# EAGLE board SparkFun NEO-M8U-Panel (EAGLE 9.5.2), part 1 of 2
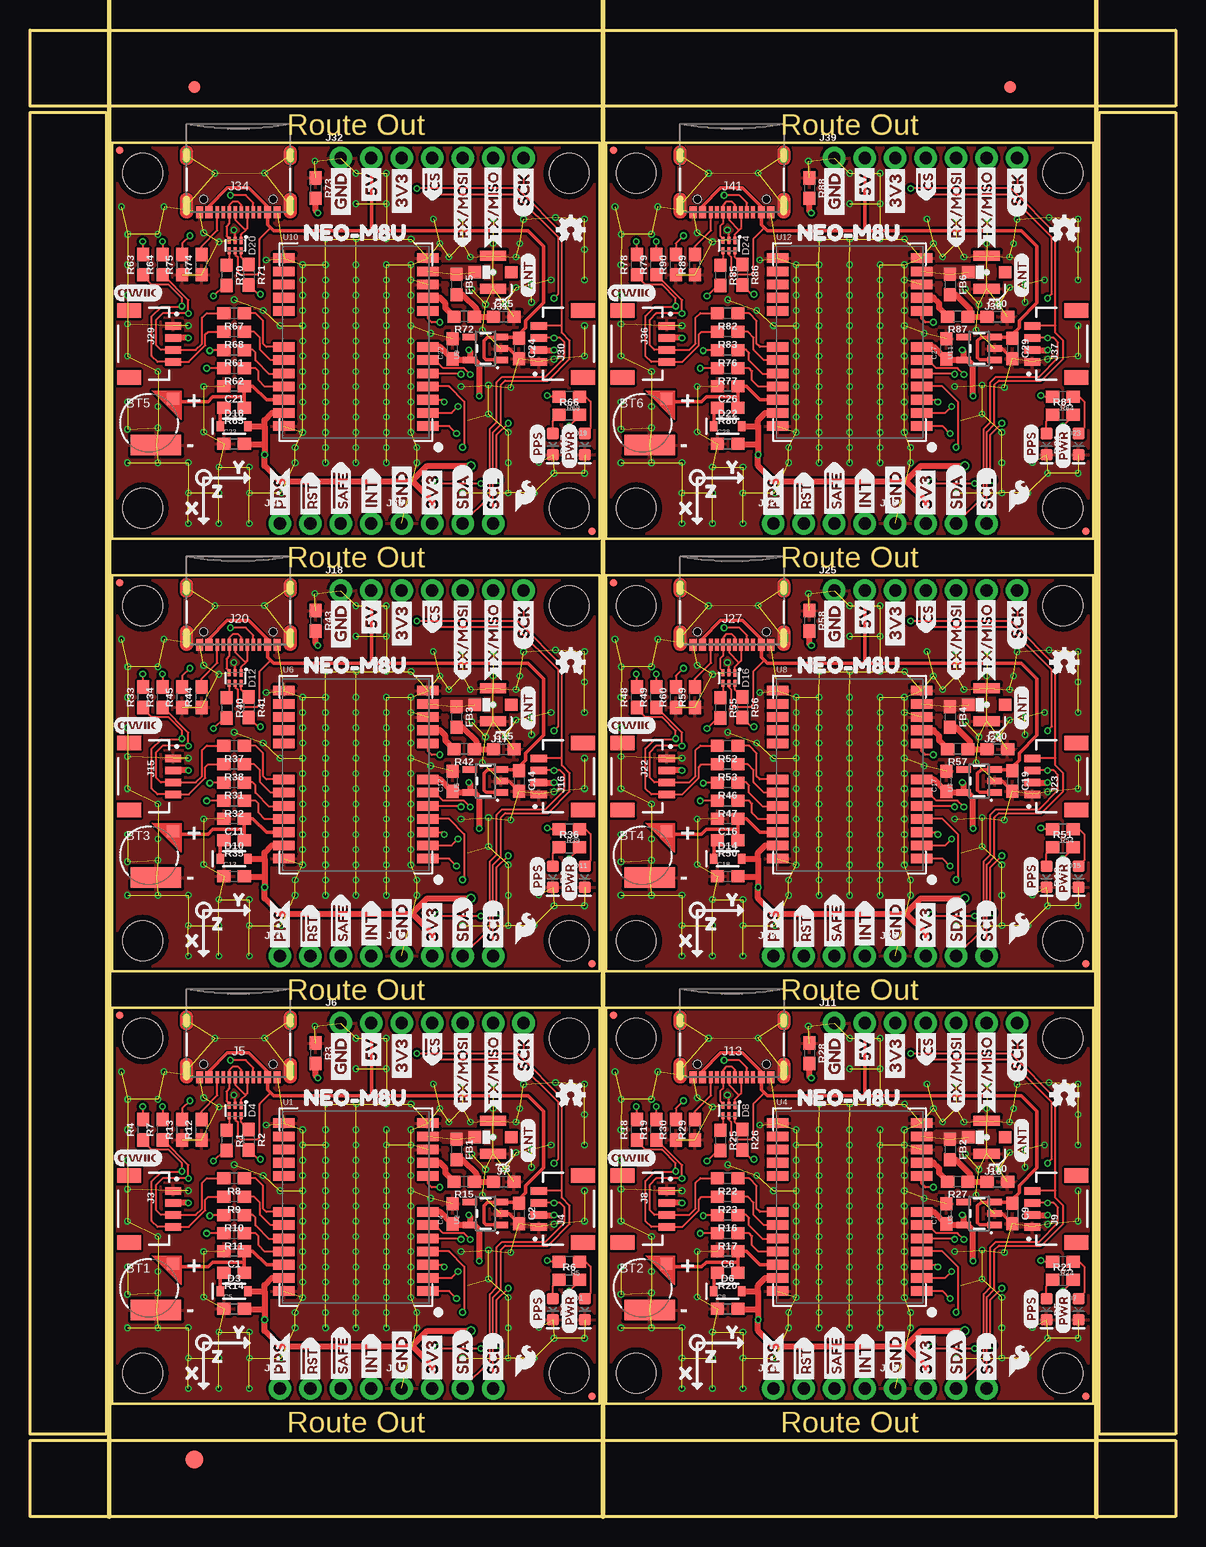
[diagram p0: board, top side]
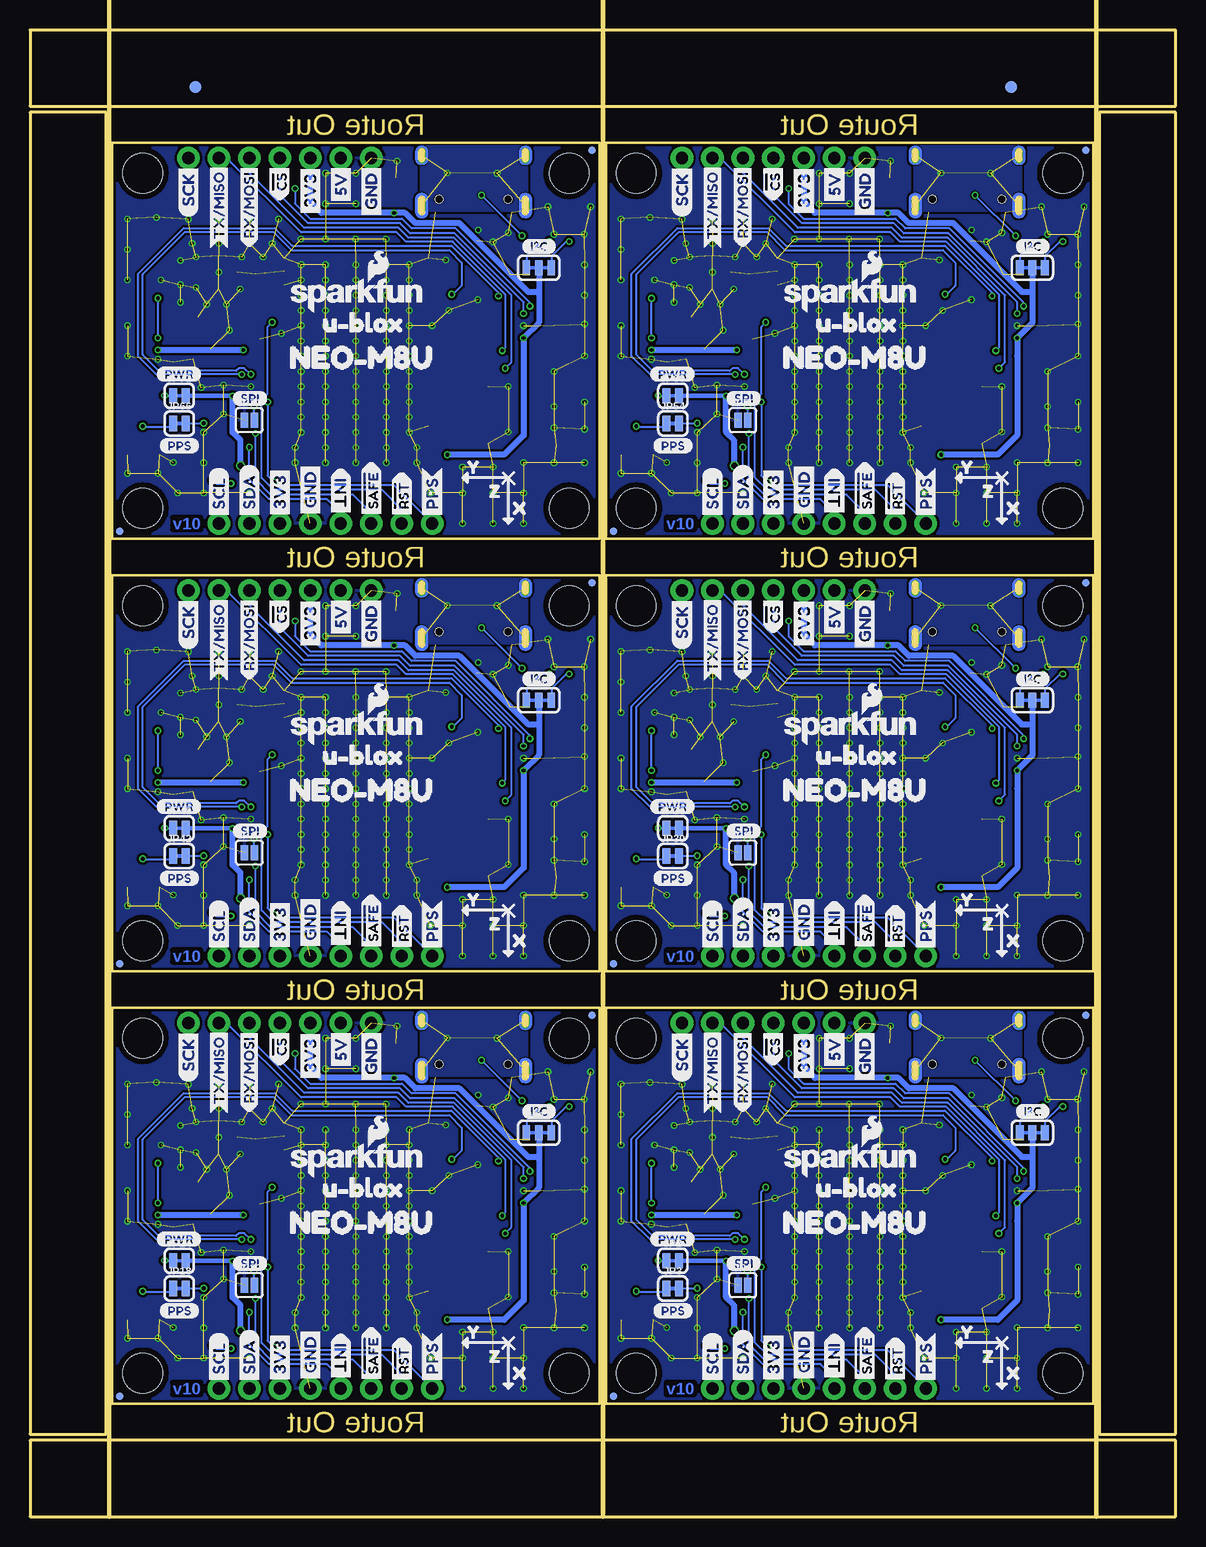
[diagram p1: board, bottom side, seen from below]

Size 95.5 x 123.88 mm. Coordinates in mm from the lower left corner, seen from the top.
Outline: 6.86,9.4 6.86,42.39 47.5,42.39 47.5,9.4 6.86,9.4
Outline: 48.01,9.4 48.01,42.39 88.65,42.39 88.65,9.4 48.01,9.4
Outline: 6.86,45.44 6.86,78.44 47.5,78.44 47.5,45.44 6.86,45.44
Outline: 48.01,45.44 48.01,78.44 88.65,78.44 88.65,45.44 48.01,45.44
Outline: 6.86,81.48 6.86,114.48 47.5,114.48 47.5,81.48 6.86,81.48
Outline: 48.01,81.48 48.01,114.48 88.65,114.48 88.65,81.48 48.01,81.48
Outline: 0,6.35 95.5,6.35 95.5,0 0,0 0,6.35
Outline: 89.15,117.02 95.5,117.02 95.5,6.86 89.15,6.86 89.15,117.02
Outline: 0,123.88 95.5,123.88 95.5,117.53 0,117.53 0,123.88
Outline: 0,117.02 6.35,117.02 6.35,6.86 0,6.86 0,117.02
Copper layers (1*16): Top 0.035mm / dielectric 1.5mm / Bottom 0.035mm
Design rules "SparkFun": minimum track width 4mil, minimum drill 6mil, track to track 4mil, track to pad 4mil, pad to pad 4mil, via to via 4mil, smd to smd 4mil, copper to edge 4mil, drill to drill 4mil, minimum pad ring 5mil, minimum via ring 5mil, stop-mask expansion 4mil, vias tented up to drill 25mil, thermal gap 10mil
Net classes: 2 3.3V: width 0.508 mm
bRestrict: area 36.1,18.2 to 37,18.5; area 77.2,18.2 to 78.1,18.5; area 36.1,54.2 to 37,54.6; area 77.2,54.2 to 78.1,54.6; area 36.1,90.2 to 37,90.6; area 77.2,90.2 to 78.1,90.6
Milling: 3 lines

## Footprints (pad centres in the part's own frame; a part is rotated, then mirrored left to right if it is on the bottom)
ML414H_IV01E = smd 1 x 1: + 2.022,2.032 | smd 4.2 x 1.7: - 0.6,-1.85
0603 = smd 1.1 x 1: 1 -0.85,0; 2 0.85,0
LED-0603 = smd 1 x 1: A -0.877,0; C 0.877,0
SOD-323 = smd 0.63 x 0.83: A 1.15,0; C -1.15,0
SOT886 = smd 0.61 x 0.25: 1 -0.405,0.5 | smd 0.56 x 0.25: 2 -0.43,0; 3 -0.43,-0.5; 4 0.43,-0.5; 5 0.43,0; 6 0.43,0.5
FIDUCIAL-1X2 = smd 1 x 1: 1 0,0
FIDUCIAL-1.5X3 = smd 1.5 x 1.5: 1 0,0
1X04_NO_SILK = drill 1.016 pad 1.88: 1 0,0; 2 2.54,0; 3 5.08,0; 4 7.62,0
JST04_1MM_RA = smd 0.6 x 1.35: 1 -1.5,0; 2 -0.5,0; 3 0.5,0; 4 1.5,0 | smd 1.2 x 2: NC1 2.8,-3.675; NC2 -2.8,-3.675
USB-C-16P-2LAYER-PADS = smd 0.3 x 1: A5 -1.25,-0.34; A6 -0.25,-0.34; A7 0.25,-0.34; A8 1.25,-0.34; B5 1.75,-0.34; B6 0.75,-0.34; B7 -0.75,-0.34; B8 -1.75,-0.34 | smd 0.6 x 1: GND -3.225,-0.34; GND2 3.225,-0.34; VBUS1 -2.45,-0.34; VBUS2 2.45,-0.34 | drill 0.4 pad 0.6 long: SHLD1 -4.318,-0.915; SHLD2 4.318,-0.915; SHLD3 -4.318,-5.095; SHLD4 4.318,-5.095 | hole 0.65: -2.89,-1.445; 2.89,-1.445
1X07_NO_SILK = drill 1.016 pad 1.88: 1 0,0; 2 2.54,0; 3 5.08,0; 4 7.62,0; 5 10.16,0; 6 12.7,0; 7 15.24,0
U.FL = smd 2.2 x 0.85: 1 0,1.375; 2 0,-1.375 | smd 1.05 x 1: FEED 1.525,0; NC -1.525,0
SMT-JUMPER_3_2-NC_TRACE_SILK = smd 0.66 x 1.27: 1 -1.041,0; 2 0,0; 3 1.041,0
SMT-JUMPER_2_NC_TRACE_SILK = smd 0.66 x 1.27: 1 -0.521,0; 2 0.521,0
SMT-JUMPER_2_NO_SILK = smd 0.635 x 1.27: 1 -0.406,0; 2 0.406,0
MICRO-FIDUCIAL = smd 0.635 x 0.635: 1 0,0
STAND-OFF = hole 3.302: 0,0
NEO-M9N/M8T/M8U = smd 1.8 x 0.8: 1 6,-7; 2 6,-5.9; 3 6,-4.8; 4 6,-3.7; 5 6,-2.6; 6 6,-1.5; 7 6,-0.4; 8 6,2.6; 9 6,3.7; 10 6,4.8; 11 6,5.9; 12 6,7; 13 -6,7; 14 -6,5.9; 15 -6,4.8; 16 -6,3.7; 17 -6,2.6; 18 -6,-0.4; 19 -6,-1.5; 20 -6,-2.6; 21 -6,-3.7; 22 -6,-4.8; 23 -6,-5.9; 24 -6,-7
SOT23-5 = smd 0.55 x 1.2: 1 -0.95,-1.3; 2 0,-1.3; 3 0.95,-1.3; 4 0.95,1.3; 5 -0.95,1.3

## Placement (x,y rotation side)
BT1  6.8MM_COIN_CELL  [ML414H_IV01E]  9.91,19.05 0 top
BT2  6.8MM_COIN_CELL  [ML414H_IV01E]  51.05,19.05 0 top
BT3  6.8MM_COIN_CELL  [ML414H_IV01E]  9.91,55.09 0 top
BT4  6.8MM_COIN_CELL  [ML414H_IV01E]  51.05,55.09 0 top
BT5  6.8MM_COIN_CELL  [ML414H_IV01E]  9.91,91.14 0 top
BT6  6.8MM_COIN_CELL  [ML414H_IV01E]  51.05,91.14 0 top
C1  1.0uF  [0603]  17.02,22.12 180 top
C2  1.0uF  [0603]  40.77,25.25 270 top
C3  47pF  [0603]  39.5,27.91 0 top
C4  1.0uF  [0603]  35.23,25.22 90 top
C5  0.1uF  [0603]  17.02,17.3 0 top
C6  1.0uF  [0603]  58.17,22.12 180 top
C7  1.0uF  [0603]  76.38,25.22 90 top
C8  0.1uF  [0603]  58.17,17.3 0 top
C9  1.0uF  [0603]  81.92,25.25 270 top
C10  47pF  [0603]  80.65,27.91 0 top
C11  1.0uF  [0603]  17.02,58.17 180 top
C12  1.0uF  [0603]  35.23,61.26 90 top
C13  0.1uF  [0603]  17.02,53.34 0 top
C14  1.0uF  [0603]  40.77,61.29 270 top
C15  47pF  [0603]  39.5,63.96 0 top
C16  1.0uF  [0603]  58.17,58.17 180 top
C17  1.0uF  [0603]  76.38,61.26 90 top
C18  0.1uF  [0603]  58.17,53.34 0 top
C19  1.0uF  [0603]  81.92,61.29 270 top
C20  47pF  [0603]  80.65,63.96 0 top
C21  1.0uF  [0603]  17.02,94.21 180 top
C22  1.0uF  [0603]  35.23,97.31 90 top
C23  0.1uF  [0603]  17.02,89.38 0 top
C24  1.0uF  [0603]  40.77,97.33 270 top
C25  47pF  [0603]  39.5,100 0 top
C26  1.0uF  [0603]  58.17,94.21 180 top
C27  1.0uF  [0603]  76.38,97.31 90 top
C28  0.1uF  [0603]  58.17,89.38 0 top
C29  1.0uF  [0603]  81.92,97.33 270 top
C30  47pF  [0603]  80.65,100 0 top
D1  RED  [LED-0603]  46.25,17.27 270 top
D2  BLUE  [LED-0603]  43.59,17.27 270 top
D3  0.5A/40V/420mV  [SOD-323]  17.02,18.77 0 top
D4  PRTR5V0U2F  [SOT886]  17.12,33.83 270 top
D5  BLUE  [LED-0603]  84.73,17.27 270 top
D6  0.5A/40V/420mV  [SOD-323]  58.17,18.77 0 top
D7  RED  [LED-0603]  87.4,17.27 270 top
D8  PRTR5V0U2F  [SOT886]  58.27,33.83 270 top
D9  BLUE  [LED-0603]  43.59,53.31 270 top
D10  0.5A/40V/420mV  [SOD-323]  17.02,54.81 0 top
D11  RED  [LED-0603]  46.25,53.31 270 top
D12  PRTR5V0U2F  [SOT886]  17.12,69.88 270 top
D13  BLUE  [LED-0603]  84.73,53.31 270 top
D14  0.5A/40V/420mV  [SOD-323]  58.17,54.81 0 top
D15  RED  [LED-0603]  87.4,53.31 270 top
D16  PRTR5V0U2F  [SOT886]  58.27,69.88 270 top
D17  BLUE  [LED-0603]  43.59,89.36 270 top
D18  0.5A/40V/420mV  [SOD-323]  17.02,90.86 0 top
D19  RED  [LED-0603]  46.25,89.36 270 top
D20  PRTR5V0U2F  [SOT886]  17.12,105.92 270 top
D21  BLUE  [LED-0603]  84.73,89.36 270 top
D22  0.5A/40V/420mV  [SOD-323]  58.17,90.86 0 top
D23  RED  [LED-0603]  87.4,89.36 270 top
D24  PRTR5V0U2F  [SOT886]  58.27,105.92 270 top
E$1  [FIDUCIAL-1X2]  13.72,119.11 0 top
E$2  [FIDUCIAL-1X2]  13.72,119.11 0 bottom
E$3  [FIDUCIAL-1X2]  81.72,119.11 0 top
E$4  [FIDUCIAL-1X2]  81.72,119.11 0 bottom
E$5  [FIDUCIAL-1.5X3]  13.72,4.76 0 top
FB1  30Ω/1.8A  [0603]  35.56,30.58 270 top
FB2  30Ω/1.8A  [0603]  76.71,30.58 270 top
FB3  30Ω/1.8A  [0603]  35.56,66.62 270 top
FB4  30Ω/1.8A  [0603]  76.71,66.62 270 top
FB5  30Ω/1.8A  [0603]  35.56,102.67 270 top
FB6  30Ω/1.8A  [0603]  76.71,102.67 270 top
J1  [1X04_NO_SILK]  30.99,10.67 0 top
J2  [1X04_NO_SILK]  20.83,10.67 0 top
J3  Qwiic Right Angle  [JST04_1MM_RA]  11.94,25.63 270 top
J4  Qwiic Right Angle  [JST04_1MM_RA]  42.42,25.63 90 top
J5  [USB-C-16P-2LAYER-PADS]  17.37,36.25 180 top
J6  [1X07_NO_SILK]  25.91,41.12 0 top
J7  U.FL  [U.FL]  38.61,31.6 180 top
J8  Qwiic Right Angle  [JST04_1MM_RA]  53.09,25.63 270 top
J9  Qwiic Right Angle  [JST04_1MM_RA]  83.57,25.63 90 top
J10  U.FL  [U.FL]  79.76,31.6 180 top
J11  [1X07_NO_SILK]  67.06,41.12 0 top
J12  [1X04_NO_SILK]  72.14,10.67 0 top
J13  [USB-C-16P-2LAYER-PADS]  58.52,36.25 180 top
J14  [1X04_NO_SILK]  61.98,10.67 0 top
J15  Qwiic Right Angle  [JST04_1MM_RA]  11.94,61.67 270 top
J16  Qwiic Right Angle  [JST04_1MM_RA]  42.42,61.67 90 top
J17  U.FL  [U.FL]  38.61,67.64 180 top
J18  [1X07_NO_SILK]  25.91,77.17 0 top
J19  [1X04_NO_SILK]  30.99,46.71 0 top
J20  [USB-C-16P-2LAYER-PADS]  17.37,72.29 180 top
J21  [1X04_NO_SILK]  20.83,46.71 0 top
J22  Qwiic Right Angle  [JST04_1MM_RA]  53.09,61.67 270 top
J23  Qwiic Right Angle  [JST04_1MM_RA]  83.57,61.67 90 top
J24  U.FL  [U.FL]  79.76,67.64 180 top
J25  [1X07_NO_SILK]  67.06,77.17 0 top
J26  [1X04_NO_SILK]  72.14,46.71 0 top
J27  [USB-C-16P-2LAYER-PADS]  58.52,72.29 180 top
J28  [1X04_NO_SILK]  61.98,46.71 0 top
J29  Qwiic Right Angle  [JST04_1MM_RA]  11.94,97.71 270 top
J30  Qwiic Right Angle  [JST04_1MM_RA]  42.42,97.71 90 top
J31  U.FL  [U.FL]  38.61,103.68 180 top
J32  [1X07_NO_SILK]  25.91,113.21 0 top
J33  [1X04_NO_SILK]  30.99,82.75 0 top
J34  [USB-C-16P-2LAYER-PADS]  17.37,108.33 180 top
J35  [1X04_NO_SILK]  20.83,82.75 0 top
J36  Qwiic Right Angle  [JST04_1MM_RA]  53.09,97.71 270 top
J37  Qwiic Right Angle  [JST04_1MM_RA]  83.57,97.71 90 top
J38  U.FL  [U.FL]  79.76,103.68 180 top
J39  [1X07_NO_SILK]  67.06,113.21 0 top
J40  [1X04_NO_SILK]  72.14,82.75 0 top
J41  [USB-C-16P-2LAYER-PADS]  58.52,108.33 180 top
J42  [1X04_NO_SILK]  61.98,82.75 0 top
JP1  JUMPER-SMT_3_2-NC_TRACE_SILK  [SMT-JUMPER_3_2-NC_TRACE_SILK]  11.94,31.98 0 bottom
JP2  JUMPER-SMT_2_NC_TRACE_SILK  [SMT-JUMPER_2_NC_TRACE_SILK]  41.91,21.31 0 bottom
JP3  JUMPER-SMT_2_NC_TRACE_SILK  [SMT-JUMPER_2_NC_TRACE_SILK]  41.91,19 0 bottom
JP4  JUMPER-SMT_2_NO_SILK  [SMT-JUMPER_2_NO_SILK]  36.07,19.28 0 bottom
JP5  FIDUCIALUFIDUCIAL  [MICRO-FIDUCIAL]  46.86,10.03 0 top
JP6  FIDUCIALUFIDUCIAL  [MICRO-FIDUCIAL]  46.86,10.03 0 bottom
JP7  FIDUCIALUFIDUCIAL  [MICRO-FIDUCIAL]  7.49,41.76 0 top
JP8  FIDUCIALUFIDUCIAL  [MICRO-FIDUCIAL]  7.49,41.76 0 bottom
JP9  STAND-OFF  [STAND-OFF]  9.4,11.94 0 top
JP10  STAND-OFF  [STAND-OFF]  44.96,11.94 0 top
JP11  STAND-OFF  [STAND-OFF]  9.4,39.85 0 top
JP12  STAND-OFF  [STAND-OFF]  44.96,39.85 0 top
JP13  STAND-OFF  [STAND-OFF]  50.55,39.85 0 top
JP14  STAND-OFF  [STAND-OFF]  86.11,39.85 0 top
JP15  FIDUCIALUFIDUCIAL  [MICRO-FIDUCIAL]  88.01,10.03 0 top
JP16  FIDUCIALUFIDUCIAL  [MICRO-FIDUCIAL]  48.64,41.76 0 top
JP17  JUMPER-SMT_3_2-NC_TRACE_SILK  [SMT-JUMPER_3_2-NC_TRACE_SILK]  53.09,31.98 0 bottom
JP18  JUMPER-SMT_2_NC_TRACE_SILK  [SMT-JUMPER_2_NC_TRACE_SILK]  83.06,19 0 bottom
JP19  FIDUCIALUFIDUCIAL  [MICRO-FIDUCIAL]  88.01,10.03 0 bottom
JP20  FIDUCIALUFIDUCIAL  [MICRO-FIDUCIAL]  48.64,41.76 0 bottom
JP21  STAND-OFF  [STAND-OFF]  50.55,11.94 0 top
JP22  STAND-OFF  [STAND-OFF]  86.11,11.94 0 top
JP23  JUMPER-SMT_2_NO_SILK  [SMT-JUMPER_2_NO_SILK]  77.22,19.28 0 bottom
JP24  JUMPER-SMT_2_NC_TRACE_SILK  [SMT-JUMPER_2_NC_TRACE_SILK]  83.06,21.31 0 bottom
JP25  STAND-OFF  [STAND-OFF]  9.4,75.9 0 top
JP26  STAND-OFF  [STAND-OFF]  44.96,75.9 0 top
JP27  FIDUCIALUFIDUCIAL  [MICRO-FIDUCIAL]  46.86,46.08 0 top
JP28  FIDUCIALUFIDUCIAL  [MICRO-FIDUCIAL]  7.49,77.8 0 top
JP29  JUMPER-SMT_3_2-NC_TRACE_SILK  [SMT-JUMPER_3_2-NC_TRACE_SILK]  11.94,68.02 0 bottom
JP30  JUMPER-SMT_2_NC_TRACE_SILK  [SMT-JUMPER_2_NC_TRACE_SILK]  41.91,55.04 0 bottom
JP31  FIDUCIALUFIDUCIAL  [MICRO-FIDUCIAL]  46.86,46.08 0 bottom
JP32  FIDUCIALUFIDUCIAL  [MICRO-FIDUCIAL]  7.49,77.8 0 bottom
JP33  STAND-OFF  [STAND-OFF]  9.4,47.98 0 top
JP34  STAND-OFF  [STAND-OFF]  44.96,47.98 0 top
JP35  JUMPER-SMT_2_NO_SILK  [SMT-JUMPER_2_NO_SILK]  36.07,55.32 0 bottom
JP36  JUMPER-SMT_2_NC_TRACE_SILK  [SMT-JUMPER_2_NC_TRACE_SILK]  41.91,57.35 0 bottom
JP37  STAND-OFF  [STAND-OFF]  50.55,75.9 0 top
JP38  STAND-OFF  [STAND-OFF]  86.11,75.9 0 top
JP39  FIDUCIALUFIDUCIAL  [MICRO-FIDUCIAL]  88.01,46.08 0 top
JP40  FIDUCIALUFIDUCIAL  [MICRO-FIDUCIAL]  48.64,77.8 0 top
JP41  JUMPER-SMT_3_2-NC_TRACE_SILK  [SMT-JUMPER_3_2-NC_TRACE_SILK]  53.09,68.02 0 bottom
JP42  JUMPER-SMT_2_NC_TRACE_SILK  [SMT-JUMPER_2_NC_TRACE_SILK]  83.06,55.04 0 bottom
JP43  FIDUCIALUFIDUCIAL  [MICRO-FIDUCIAL]  88.01,46.08 0 bottom
JP44  FIDUCIALUFIDUCIAL  [MICRO-FIDUCIAL]  48.64,77.8 0 bottom
JP45  STAND-OFF  [STAND-OFF]  50.55,47.98 0 top
JP46  STAND-OFF  [STAND-OFF]  86.11,47.98 0 top
JP47  JUMPER-SMT_2_NO_SILK  [SMT-JUMPER_2_NO_SILK]  77.22,55.32 0 bottom
JP48  JUMPER-SMT_2_NC_TRACE_SILK  [SMT-JUMPER_2_NC_TRACE_SILK]  83.06,57.35 0 bottom
JP49  STAND-OFF  [STAND-OFF]  9.4,111.94 0 top
JP50  STAND-OFF  [STAND-OFF]  44.96,111.94 0 top
JP51  FIDUCIALUFIDUCIAL  [MICRO-FIDUCIAL]  46.86,82.12 0 top
JP52  FIDUCIALUFIDUCIAL  [MICRO-FIDUCIAL]  7.49,113.84 0 top
JP53  JUMPER-SMT_3_2-NC_TRACE_SILK  [SMT-JUMPER_3_2-NC_TRACE_SILK]  11.94,104.06 0 bottom
JP54  JUMPER-SMT_2_NC_TRACE_SILK  [SMT-JUMPER_2_NC_TRACE_SILK]  41.91,91.08 0 bottom
JP55  FIDUCIALUFIDUCIAL  [MICRO-FIDUCIAL]  46.86,82.12 0 bottom
JP56  FIDUCIALUFIDUCIAL  [MICRO-FIDUCIAL]  7.49,113.84 0 bottom
JP57  STAND-OFF  [STAND-OFF]  9.4,84.02 0 top
JP58  STAND-OFF  [STAND-OFF]  44.96,84.02 0 top
JP59  JUMPER-SMT_2_NO_SILK  [SMT-JUMPER_2_NO_SILK]  36.07,91.36 0 bottom
JP60  JUMPER-SMT_2_NC_TRACE_SILK  [SMT-JUMPER_2_NC_TRACE_SILK]  41.91,93.4 0 bottom
JP61  STAND-OFF  [STAND-OFF]  50.55,111.94 0 top
JP62  STAND-OFF  [STAND-OFF]  86.11,111.94 0 top
JP63  FIDUCIALUFIDUCIAL  [MICRO-FIDUCIAL]  88.01,82.12 0 top
JP64  FIDUCIALUFIDUCIAL  [MICRO-FIDUCIAL]  48.64,113.84 0 top
JP65  JUMPER-SMT_3_2-NC_TRACE_SILK  [SMT-JUMPER_3_2-NC_TRACE_SILK]  53.09,104.06 0 bottom
JP66  JUMPER-SMT_2_NC_TRACE_SILK  [SMT-JUMPER_2_NC_TRACE_SILK]  83.06,91.08 0 bottom
JP67  FIDUCIALUFIDUCIAL  [MICRO-FIDUCIAL]  88.01,82.12 0 bottom
JP68  FIDUCIALUFIDUCIAL  [MICRO-FIDUCIAL]  48.64,113.84 0 bottom
JP69  STAND-OFF  [STAND-OFF]  50.55,84.02 0 top
JP70  STAND-OFF  [STAND-OFF]  86.11,84.02 0 top
JP71  JUMPER-SMT_2_NO_SILK  [SMT-JUMPER_2_NO_SILK]  77.22,91.36 0 bottom
JP72  JUMPER-SMT_2_NC_TRACE_SILK  [SMT-JUMPER_2_NC_TRACE_SILK]  83.06,93.4 0 bottom
LOGO1  OSHW-LOGOMINI  [OSHW-LOGO-MINI]  45.08,35.15 0 top
LOGO2  SFE_LOGO_NAME_FLAME.1_INCH  [SFE_LOGO_NAME_FLAME_.1]  27.05,29.69 0 bottom
LOGO3  OSHW-LOGOMINI  [OSHW-LOGO-MINI]  86.23,35.15 0 top
LOGO4  SFE_LOGO_NAME_FLAME.1_INCH  [SFE_LOGO_NAME_FLAME_.1]  68.2,29.69 0 bottom
LOGO5  OSHW-LOGOMINI  [OSHW-LOGO-MINI]  45.08,71.2 0 top
LOGO6  SFE_LOGO_NAME_FLAME.1_INCH  [SFE_LOGO_NAME_FLAME_.1]  27.05,65.74 0 bottom
LOGO7  OSHW-LOGOMINI  [OSHW-LOGO-MINI]  86.23,71.2 0 top
LOGO8  SFE_LOGO_NAME_FLAME.1_INCH  [SFE_LOGO_NAME_FLAME_.1]  68.2,65.74 0 bottom
LOGO9  OSHW-LOGOMINI  [OSHW-LOGO-MINI]  45.08,107.24 0 top
LOGO10  SFE_LOGO_NAME_FLAME.1_INCH  [SFE_LOGO_NAME_FLAME_.1]  27.05,101.78 0 bottom
LOGO11  OSHW-LOGOMINI  [OSHW-LOGO-MINI]  86.23,107.24 0 top
LOGO12  SFE_LOGO_NAME_FLAME.1_INCH  [SFE_LOGO_NAME_FLAME_.1]  68.2,101.78 0 bottom
R1  27  [0603]  16.41,31.34 270 top
R2  27  [0603]  18.24,31.39 270 top
R3  100k  [0603]  23.83,38.61 270 top
R4  2.2k  [0603]  9.45,32.23 90 top
R5  1k  [0603]  44.96,21.23 180 top
R6  1k  [0603]  44.96,19.71 0 top
R7  2.2k  [0603]  11.07,32.23 90 top
R8  33  [0603]  17.02,28.17 180 top
R9  33  [0603]  17.02,26.64 180 top
R10  33  [0603]  17.02,25.12 180 top
R11  33  [0603]  17.02,23.6 180 top
R12  5.1k  [0603]  14.3,32.23 90 top
R13  5.1k  [0603]  12.7,32.23 90 top
R14  1k  [0603]  17.02,20.29 180 top
R15  10  [0603]  36.2,27.91 180 top
R16  33  [0603]  58.17,25.12 180 top
R17  33  [0603]  58.17,23.6 180 top
R18  2.2k  [0603]  50.6,32.23 90 top
R19  2.2k  [0603]  52.22,32.23 90 top
R20  1k  [0603]  58.17,20.29 180 top
R21  1k  [0603]  86.11,19.71 0 top
R22  33  [0603]  58.17,28.17 180 top
R23  33  [0603]  58.17,26.64 180 top
R24  1k  [0603]  86.11,21.23 180 top
R25  27  [0603]  57.56,31.34 270 top
R26  27  [0603]  59.39,31.39 270 top
R27  10  [0603]  77.34,27.91 180 top
R28  100k  [0603]  64.97,38.61 270 top
R29  5.1k  [0603]  55.45,32.23 90 top
R30  5.1k  [0603]  53.85,32.23 90 top
R31  33  [0603]  17.02,61.16 180 top
R32  33  [0603]  17.02,59.64 180 top
R33  2.2k  [0603]  9.45,68.28 90 top
R34  2.2k  [0603]  11.07,68.28 90 top
R35  1k  [0603]  17.02,56.34 180 top
R36  1k  [0603]  44.96,55.75 0 top
R37  33  [0603]  17.02,64.21 180 top
R38  33  [0603]  17.02,62.69 180 top
R39  1k  [0603]  44.96,57.28 180 top
R40  27  [0603]  16.41,67.39 270 top
R41  27  [0603]  18.24,67.44 270 top
R42  10  [0603]  36.2,63.96 180 top
R43  100k  [0603]  23.83,74.65 270 top
R44  5.1k  [0603]  14.3,68.28 90 top
R45  5.1k  [0603]  12.7,68.28 90 top
R46  33  [0603]  58.17,61.16 180 top
R47  33  [0603]  58.17,59.64 180 top
R48  2.2k  [0603]  50.6,68.28 90 top
R49  2.2k  [0603]  52.22,68.28 90 top
R50  1k  [0603]  58.17,56.34 180 top
R51  1k  [0603]  86.11,55.75 0 top
R52  33  [0603]  58.17,64.21 180 top
R53  33  [0603]  58.17,62.69 180 top
R54  1k  [0603]  86.11,57.28 180 top
R55  27  [0603]  57.56,67.39 270 top
R56  27  [0603]  59.39,67.44 270 top
R57  10  [0603]  77.34,63.96 180 top
R58  100k  [0603]  64.97,74.65 270 top
R59  5.1k  [0603]  55.45,68.28 90 top
R60  5.1k  [0603]  53.85,68.28 90 top
R61  33  [0603]  17.02,97.21 180 top
R62  33  [0603]  17.02,95.68 180 top
R63  2.2k  [0603]  9.45,104.32 90 top
R64  2.2k  [0603]  11.07,104.32 90 top
R65  1k  [0603]  17.02,92.38 180 top
R66  1k  [0603]  44.96,91.8 0 top
R67  33  [0603]  17.02,100.25 180 top
R68  33  [0603]  17.02,98.73 180 top
R69  1k  [0603]  44.96,93.32 180 top
R70  27  [0603]  16.41,103.43 270 top
R71  27  [0603]  18.24,103.48 270 top
R72  10  [0603]  36.2,100 180 top
R73  100k  [0603]  23.83,110.69 270 top
R74  5.1k  [0603]  14.3,104.32 90 top
R75  5.1k  [0603]  12.7,104.32 90 top
R76  33  [0603]  58.17,97.21 180 top
R77  33  [0603]  58.17,95.68 180 top
R78  2.2k  [0603]  50.6,104.32 90 top
R79  2.2k  [0603]  52.22,104.32 90 top
R80  1k  [0603]  58.17,92.38 180 top
R81  1k  [0603]  86.11,91.8 0 top
R82  33  [0603]  58.17,100.25 180 top
R83  33  [0603]  58.17,98.73 180 top
R84  1k  [0603]  86.11,93.32 180 top
R85  27  [0603]  57.56,103.43 270 top
R86  27  [0603]  59.39,103.48 270 top
R87  10  [0603]  77.34,100 180 top
R88  100k  [0603]  64.97,110.69 270 top
R89  5.1k  [0603]  55.45,104.32 90 top
R90  5.1k  [0603]  53.85,104.32 90 top
U1  U-BLOX_MEO-M8U  [NEO-M9N/M8T/M8U]  27.18,25.78 0 top
U2  3.3V  [SOT23-5]  37.97,25.25 90 top
U3  3.3V  [SOT23-5]  79.12,25.25 90 top
U4  U-BLOX_MEO-M8U  [NEO-M9N/M8T/M8U]  68.33,25.78 0 top
U5  3.3V  [SOT23-5]  37.97,61.29 90 top
U6  U-BLOX_MEO-M8U  [NEO-M9N/M8T/M8U]  27.18,61.82 0 top
U7  3.3V  [SOT23-5]  79.12,61.29 90 top
U8  U-BLOX_MEO-M8U  [NEO-M9N/M8T/M8U]  68.33,61.82 0 top
U9  3.3V  [SOT23-5]  37.97,97.33 90 top
U10  U-BLOX_MEO-M8U  [NEO-M9N/M8T/M8U]  27.18,97.87 0 top
U11  3.3V  [SOT23-5]  79.12,97.33 90 top
U12  U-BLOX_MEO-M8U  [NEO-M9N/M8T/M8U]  68.33,97.87 0 top
U$1  [SDA-[)]  36.07,10.92 90 top
U$2  [INT1]  28.45,11.05 90 top
U$3  [SCL-[)]  38.61,10.92 90 top
U$4  [SDA-[)]  36.07,10.92 90 bottom
U$5  [SCL-[)]  38.61,10.92 90 bottom
U$6  [3V3-04]  33.53,10.92 90 top
U$7  [3V3-04]  33.53,10.92 90 bottom
U$8  [GND-04]  30.99,11.05 90 top
U$9  [GND-04]  30.99,11.05 90 bottom
U$10  [I_SUPER2_C-()-03]  13.34,33.76 0 bottom
U$11  [SPI1]  37.46,21.08 0 bottom
U$12  [PPS0]  43.56,17.14 0 bottom
U$13  [X1]  12.06,11.94 0 top
U$14  [QWIIC_4MM]  9.02,29.87 0 top
U$15  [NEO#M8U0]  34.29,24.51 0 bottom
U$16  [X1]  14.99,11.94 0 bottom
U$17  [PWR1]  43.81,23.11 0 bottom
U$18  [PWR-()-03]  44.98,15.24 90 top
U$19  [5V]  28.45,37.06 90 top
U$20  [5V]  28.45,37.06 90 bottom
U$21  [Y2]  18.8,15.37 0 bottom
U$22  [U#BLOX3]  31.37,27.41 0 bottom
U$23  [CS#-<]]  33.55,37.31 90 top
U$24  [CS#-<]]  33.55,37.31 90 bottom
U$25  [ANT0]  41.53,29.46 90 top
U$26  [RX#MOSI3]  36.07,33.63 90 top
U$27  [Y2]  16,15.37 0 top
U$28  [Z0]  14.22,13.33 0 top
U$29  [TX#MISO1]  38.61,33.53 90 top
U$30  [Z0]  17.02,13.33 0 bottom
U$31  [RX#MOSI3]  36.09,33.63 90 bottom
U$32  [INT0]  28.45,15.37 270 bottom
U$33  [SFE_LOGO_FLAME_.1]  41.3,12.98 0 top
U$34  [NEO#M8U0]  21.72,34.92 0 top
U$35  [#RST3]  23.37,10.79 90 top
U$36  [#RST3]  23.37,10.79 90 bottom
U$37  [TX#MISO1]  38.61,33.53 90 bottom
U$38  [SCK-(]-04]  41.15,36.2 90 top
U$39  [#SAFE1]  25.91,10.79 90 top
U$40  [#SAFE1]  25.91,10.79 90 bottom
U$41  [SCK-(]-04]  41.15,36.2 90 bottom
U$42  [SDA-[)]  77.22,10.92 90 top
U$43  [PPS5]  20.83,10.92 90 top
U$44  [PPS5]  20.83,10.92 90 bottom
U$45  [SCL-[)]  79.76,10.92 90 top
U$46  [SDA-[)]  77.22,10.92 90 bottom
U$47  [SCL-[)]  79.76,10.92 90 bottom
U$48  [3V3-04]  74.68,10.92 90 top
U$49  [3V3-04]  74.68,10.92 90 bottom
U$50  [GND-04]  72.14,11.05 90 top
U$51  [GND-04]  72.14,11.05 90 bottom
U$52  [PPS0]  42.32,15.62 90 top
U$53  [I_SUPER2_C-()-03]  54.48,33.76 0 bottom
U$54  [U#BLOX3]  72.52,27.41 0 bottom
U$55  [#RST3]  64.52,10.79 90 top
U$56  [#RST3]  64.52,10.79 90 bottom
U$57  [#SAFE1]  67.06,10.79 90 top
U$58  [#SAFE1]  67.06,10.79 90 bottom
U$59  [PPS5]  61.98,10.92 90 top
U$60  [3V3-04]  30.99,36.04 90 bottom
U$61  [3V3-04]  30.99,36.04 90 top
U$62  [GND-04]  25.91,35.92 90 bottom
U$63  [GND-04]  25.91,35.92 90 top
U$64  [PPS5]  61.98,10.92 90 bottom
U$65  [PPS0]  83.46,15.62 90 top
U$66  [3V3-04]  72.14,36.04 90 bottom
U$67  [3V3-04]  72.14,36.04 90 top
U$68  [GND-04]  67.06,35.92 90 bottom
U$69  [GND-04]  67.06,35.92 90 top
U$70  [PWR-()-03]  86.13,15.24 90 top
U$71  [5V]  69.6,37.06 90 top
U$72  [5V]  69.6,37.06 90 bottom
U$73  [CS#-<]]  74.7,37.31 90 top
U$74  [CS#-<]]  74.7,37.31 90 bottom
U$75  [SCK-(]-04]  82.3,36.2 90 top
U$76  [SCK-(]-04]  82.3,36.2 90 bottom
U$77  [SFE_LOGO_FLAME_.1]  82.45,12.98 0 top
U$78  [RX#MOSI3]  77.24,33.63 90 bottom
U$79  [TX#MISO1]  79.76,33.53 90 bottom
U$80  [SPI1]  78.61,21.08 0 bottom
U$81  [QWIIC_4MM]  50.16,29.87 0 top
U$82  [PPS0]  84.71,17.14 0 bottom
U$83  [PWR1]  84.96,23.11 0 bottom
U$84  [ANT0]  82.68,29.46 90 top
U$85  [X1]  53.21,11.94 0 top
U$86  [Y2]  57.15,15.37 0 top
U$87  [Z0]  55.37,13.33 0 top
U$88  [RX#MOSI3]  77.22,33.63 90 top
U$89  [TX#MISO1]  79.76,33.53 90 top
U$90  [NEO#M8U0]  75.44,24.51 0 bottom
U$91  [X1]  56.13,11.94 0 bottom
U$92  [Y2]  59.94,15.37 0 bottom
U$93  [Z0]  58.17,13.33 0 bottom
U$94  [INT1]  69.6,11.05 90 top
U$95  [INT0]  69.6,15.37 270 bottom
U$96  [NEO#M8U0]  62.86,34.92 0 top
U$97  [SDA-[)]  36.07,46.96 90 top
U$98  [SCL-[)]  38.61,46.96 90 top
U$99  [SDA-[)]  36.07,46.96 90 bottom
U$100  [SCL-[)]  38.61,46.96 90 bottom
U$101  [3V3-04]  33.53,46.96 90 top
U$102  [3V3-04]  33.53,46.96 90 bottom
U$103  [GND-04]  30.99,47.09 90 top
U$104  [GND-04]  30.99,47.09 90 bottom
U$105  [I_SUPER2_C-()-03]  13.34,69.8 0 bottom
U$106  [U#BLOX3]  31.37,63.45 0 bottom
U$107  [#RST3]  23.37,46.84 90 top
U$108  [#RST3]  23.37,46.84 90 bottom
U$109  [#SAFE1]  25.91,46.84 90 top
U$110  [#SAFE1]  25.91,46.84 90 bottom
U$111  [PPS5]  20.83,46.96 90 top
U$112  [PPS5]  20.83,46.96 90 bottom
U$113  [PPS0]  42.32,51.66 90 top
U$114  [3V3-04]  30.99,72.09 90 bottom
U$115  [3V3-04]  30.99,72.09 90 top
U$116  [GND-04]  25.91,71.96 90 bottom
U$117  [GND-04]  25.91,71.96 90 top
U$118  [PWR-()-03]  44.98,51.28 90 top
U$119  [5V]  28.45,73.1 90 top
U$120  [5V]  28.45,73.1 90 bottom
U$121  [CS#-<]]  33.55,73.36 90 top
U$122  [CS#-<]]  33.55,73.36 90 bottom
U$123  [SCK-(]-04]  41.15,72.24 90 top
U$124  [SCK-(]-04]  41.15,72.24 90 bottom
U$125  [SFE_LOGO_FLAME_.1]  41.3,49.02 0 top
U$126  [RX#MOSI3]  36.09,69.67 90 bottom
U$127  [TX#MISO1]  38.61,69.57 90 bottom
U$128  [SPI1]  37.46,57.12 0 bottom
U$129  [QWIIC_4MM]  9.02,65.91 0 top
U$130  [PPS0]  43.56,53.19 0 bottom
U$131  [PWR1]  43.81,59.16 0 bottom
U$132  [ANT0]  41.53,65.51 90 top
U$133  [X1]  12.06,47.98 0 top
U$134  [Y2]  16,51.41 0 top
U$135  [Z0]  14.22,49.38 0 top
U$136  [RX#MOSI3]  36.07,69.67 90 top
U$137  [TX#MISO1]  38.61,69.57 90 top
U$138  [NEO#M8U0]  34.29,60.55 0 bottom
U$139  [X1]  14.99,47.98 0 bottom
U$140  [Y2]  18.8,51.41 0 bottom
U$141  [Z0]  17.02,49.38 0 bottom
U$142  [INT1]  28.45,47.09 90 top
U$143  [INT0]  28.45,51.41 270 bottom
U$144  [NEO#M8U0]  21.72,70.97 0 top
U$145  [SDA-[)]  77.22,46.96 90 top
U$146  [SCL-[)]  79.76,46.96 90 top
U$147  [SDA-[)]  77.22,46.96 90 bottom
U$148  [SCL-[)]  79.76,46.96 90 bottom
U$149  [3V3-04]  74.68,46.96 90 top
U$150  [3V3-04]  74.68,46.96 90 bottom
U$151  [GND-04]  72.14,47.09 90 top
U$152  [GND-04]  72.14,47.09 90 bottom
U$153  [I_SUPER2_C-()-03]  54.48,69.8 0 bottom
U$154  [U#BLOX3]  72.52,63.45 0 bottom
U$155  [#RST3]  64.52,46.84 90 top
U$156  [#RST3]  64.52,46.84 90 bottom
U$157  [#SAFE1]  67.06,46.84 90 top
U$158  [#SAFE1]  67.06,46.84 90 bottom
U$159  [PPS5]  61.98,46.96 90 top
U$160  [PPS5]  61.98,46.96 90 bottom
U$161  [PPS0]  83.46,51.66 90 top
U$162  [3V3-04]  72.14,72.09 90 bottom
U$163  [3V3-04]  72.14,72.09 90 top
U$164  [GND-04]  67.06,71.96 90 bottom
U$165  [GND-04]  67.06,71.96 90 top
U$166  [PWR-()-03]  86.13,51.28 90 top
U$167  [5V]  69.6,73.1 90 top
U$168  [5V]  69.6,73.1 90 bottom
U$169  [CS#-<]]  74.7,73.36 90 top
U$170  [CS#-<]]  74.7,73.36 90 bottom
U$171  [SCK-(]-04]  82.3,72.24 90 top
U$172  [SCK-(]-04]  82.3,72.24 90 bottom
U$173  [SFE_LOGO_FLAME_.1]  82.45,49.02 0 top
U$174  [RX#MOSI3]  77.24,69.67 90 bottom
U$175  [TX#MISO1]  79.76,69.57 90 bottom
U$176  [SPI1]  78.61,57.12 0 bottom
U$177  [QWIIC_4MM]  50.16,65.91 0 top
U$178  [PPS0]  84.71,53.19 0 bottom
U$179  [PWR1]  84.96,59.16 0 bottom
U$180  [ANT0]  82.68,65.51 90 top
U$181  [X1]  53.21,47.98 0 top
U$182  [Y2]  57.15,51.41 0 top
U$183  [Z0]  55.37,49.38 0 top
U$184  [RX#MOSI3]  77.22,69.67 90 top
U$185  [TX#MISO1]  79.76,69.57 90 top
U$186  [NEO#M8U0]  75.44,60.55 0 bottom
U$187  [X1]  56.13,47.98 0 bottom
U$188  [Y2]  59.94,51.41 0 bottom
U$189  [Z0]  58.17,49.38 0 bottom
U$190  [INT1]  69.6,47.09 90 top
U$191  [INT0]  69.6,51.41 270 bottom
U$192  [NEO#M8U0]  62.86,70.97 0 top
U$193  [SDA-[)]  36.07,83.01 90 top
U$194  [SCL-[)]  38.61,83.01 90 top
U$195  [SDA-[)]  36.07,83.01 90 bottom
U$196  [SCL-[)]  38.61,83.01 90 bottom
U$197  [3V3-04]  33.53,83.01 90 top
U$198  [3V3-04]  33.53,83.01 90 bottom
U$199  [GND-04]  30.99,83.13 90 top
U$200  [GND-04]  30.99,83.13 90 bottom
U$201  [I_SUPER2_C-()-03]  13.34,105.84 0 bottom
U$202  [U#BLOX3]  31.37,99.49 0 bottom
U$203  [#RST3]  23.37,82.88 90 top
U$204  [#RST3]  23.37,82.88 90 bottom
U$205  [#SAFE1]  25.91,82.88 90 top
U$206  [#SAFE1]  25.91,82.88 90 bottom
U$207  [PPS5]  20.83,83.01 90 top
U$208  [PPS5]  20.83,83.01 90 bottom
U$209  [PPS0]  42.32,87.71 90 top
U$210  [3V3-04]  30.99,108.13 90 bottom
U$211  [3V3-04]  30.99,108.13 90 top
U$212  [GND-04]  25.91,108 90 bottom
U$213  [GND-04]  25.91,108 90 top
U$214  [PWR-()-03]  44.98,87.33 90 top
U$215  [5V]  28.45,109.14 90 top
U$216  [5V]  28.45,109.14 90 bottom
U$217  [CS#-<]]  33.55,109.4 90 top
U$218  [CS#-<]]  33.55,109.4 90 bottom
U$219  [SCK-(]-04]  41.15,108.28 90 top
U$220  [SCK-(]-04]  41.15,108.28 90 bottom
U$221  [SFE_LOGO_FLAME_.1]  41.3,85.06 0 top
U$222  [RX#MOSI3]  36.09,105.71 90 bottom
U$223  [TX#MISO1]  38.61,105.61 90 bottom
U$224  [SPI1]  37.46,93.17 0 bottom
U$225  [QWIIC_4MM]  9.02,101.96 0 top
U$226  [PPS0]  43.56,89.23 0 bottom
U$227  [PWR1]  43.81,95.2 0 bottom
U$228  [ANT0]  41.53,101.55 90 top
U$229  [X1]  12.06,84.02 0 top
U$230  [Y2]  16,87.45 0 top
U$231  [Z0]  14.22,85.42 0 top
U$232  [RX#MOSI3]  36.07,105.71 90 top
U$233  [TX#MISO1]  38.61,105.61 90 top
U$234  [NEO#M8U0]  34.29,96.6 0 bottom
U$235  [X1]  14.99,84.02 0 bottom
U$236  [Y2]  18.8,87.45 0 bottom
U$237  [Z0]  17.02,85.42 0 bottom
U$238  [INT1]  28.45,83.13 90 top
U$239  [INT0]  28.45,87.45 270 bottom
U$240  [NEO#M8U0]  21.72,107.01 0 top
U$241  [SDA-[)]  77.22,83.01 90 top
U$242  [SCL-[)]  79.76,83.01 90 top
U$243  [SDA-[)]  77.22,83.01 90 bottom
U$244  [SCL-[)]  79.76,83.01 90 bottom
U$245  [3V3-04]  74.68,83.01 90 top
U$246  [3V3-04]  74.68,83.01 90 bottom
U$247  [GND-04]  72.14,83.13 90 top
U$248  [GND-04]  72.14,83.13 90 bottom
U$249  [I_SUPER2_C-()-03]  54.48,105.84 0 bottom
U$250  [U#BLOX3]  72.52,99.49 0 bottom
U$251  [#RST3]  64.52,82.88 90 top
U$252  [#RST3]  64.52,82.88 90 bottom
U$253  [#SAFE1]  67.06,82.88 90 top
U$254  [#SAFE1]  67.06,82.88 90 bottom
U$255  [PPS5]  61.98,83.01 90 top
U$256  [PPS5]  61.98,83.01 90 bottom
U$257  [PPS0]  83.46,87.71 90 top
U$258  [3V3-04]  72.14,108.13 90 bottom
U$259  [3V3-04]  72.14,108.13 90 top
U$260  [GND-04]  67.06,108 90 bottom
U$261  [GND-04]  67.06,108 90 top
U$262  [PWR-()-03]  86.13,87.33 90 top
U$263  [5V]  69.6,109.14 90 top
U$264  [5V]  69.6,109.14 90 bottom
U$265  [CS#-<]]  74.7,109.4 90 top
U$266  [CS#-<]]  74.7,109.4 90 bottom
U$267  [SCK-(]-04]  82.3,108.28 90 top
U$268  [SCK-(]-04]  82.3,108.28 90 bottom
U$269  [SFE_LOGO_FLAME_.1]  82.45,85.06 0 top
U$270  [RX#MOSI3]  77.24,105.71 90 bottom
U$271  [TX#MISO1]  79.76,105.61 90 bottom
U$272  [SPI1]  78.61,93.17 0 bottom
U$273  [QWIIC_4MM]  50.16,101.96 0 top
U$274  [PPS0]  84.71,89.23 0 bottom
U$275  [PWR1]  84.96,95.2 0 bottom
U$276  [ANT0]  82.68,101.55 90 top
U$277  [X1]  53.21,84.02 0 top
U$278  [Y2]  57.15,87.45 0 top
U$279  [Z0]  55.37,85.42 0 top
U$280  [RX#MOSI3]  77.22,105.71 90 top
U$281  [TX#MISO1]  79.76,105.61 90 top
U$282  [NEO#M8U0]  75.44,96.6 0 bottom
U$283  [X1]  56.13,84.02 0 bottom
U$284  [Y2]  59.94,87.45 0 bottom
U$285  [Z0]  58.17,85.42 0 bottom
U$286  [INT1]  69.6,83.13 90 top
U$287  [INT0]  69.6,87.45 270 bottom
U$288  [NEO#M8U0]  62.86,107.01 0 top

## Library data of the parts
BT1-BT6 = SparkFun-Batteries; PROD_ID: BATT-14267
C1 C2 C4 C6 C7 C9 C11 C12 C14 C16 C17 C19 C21 C22 C24 C26 C27 C29 = SparkFun-Capacitors; PROD_ID: CAP-00868
C3 C10 C15 C20 C25 C30 = SparkFun-Capacitors; PROD_ID: CAP-08913
C5 C8 C13 C18 C23 C28 = SparkFun-Capacitors; PROD_ID: CAP-00810
D1 D7 D11 D15 D19 D23 = SparkFun-LED; PROD_ID: DIO-00819
D2 D5 D9 D13 D17 D21 = SparkFun-LED; PROD_ID: DIO-08575
D3 D6 D10 D14 D18 D22 = SparkFun-DiscreteSemi; PROD_ID: DIO-10955
D4 D8 D12 D16 D20 D24 = SparkFun-IC-Power; PROD_ID: DIO-14084
E$1-E$4 LOGO1-LOGO12 U$14 U$33 U$77 U$81 U$125 U$129 U$173 U$177 U$221 U$225 U$269 U$273 = SparkFun-Aesthetics
E$5 = SparkFun-Retired
FB1-FB6 = SparkFun-Coils; PROD_ID: NDUC-13805
J1 J2 J12 J14 J19 J21 J26 J28 J33 J35 J40 J42 = SparkFun-Connectors; PROD_ID: CONN-09696
J3 J4 J8 J9 J15 J16 J22 J23 J29 J30 J36 J37 = SparkFun-Connectors; PROD_ID: CONN-13694
J5 J13 J20 J27 J34 J41 = SparkFun-Connectors; PROD_ID: CONN-14122
J6 J11 J18 J25 J32 J39 = SparkFun-Connectors
J7 J10 J17 J24 J31 J38 = SparkFun-Connectors; PROD_ID: CONN-09193; SF_ID: WRL-09144
JP1-JP4 JP17 JP18 JP23 JP24 JP29 JP30 JP35 JP36 JP41 JP42 JP47 JP48 JP53 JP54 JP59 JP60 JP65 JP66 JP71 JP72 = SparkFun-Jumpers
JP5-JP16 JP19-JP22 JP25-JP28 JP31-JP34 JP37-JP40 JP43-JP46 JP49-JP52 JP55-JP58 JP61-JP64 JP67-JP70 = SparkFun
R1 R2 R25 R26 R40 R41 R55 R56 R70 R71 R85 R86 = SparkFun-Resistors; PROD_ID: RES-09334
R3 R28 R43 R58 R73 R88 = SparkFun-Resistors; PROD_ID: RES-07828
R4 R7 R18 R19 R33 R34 R48 R49 R63 R64 R78 R79 = SparkFun-Resistors; PROD_ID: RES-08272
R5 R6 R14 R20 R21 R24 R35 R36 R39 R50 R51 R54 R65 R66 R69 R80 R81 R84 = SparkFun-Resistors; PROD_ID: RES-07856
R8-R11 R16 R17 R22 R23 R31 R32 R37 R38 R46 R47 R52 R53 R61 R62 R67 R68 R76 R77 R82 R83 = SparkFun-Resistors; PROD_ID: RES-08270
R12 R13 R29 R30 R44 R45 R59 R60 R74 R75 R89 R90 = SparkFun-Resistors; PROD_ID: RES-12083
R15 R27 R42 R57 R72 R87 = SparkFun-Resistors; PROD_ID: RES-12581
U1 U4 U6 U8 U10 U12 = SparkFun-GPS; PROD_ID: IC-14850
U2 U3 U5 U7 U9 U11 = SparkFun-IC-Power; PROD_ID: VREG-12457
U$1 U$3-U$10 U$18-U$20 U$23 U$24 U$38 U$41 U$42 U$45-U$51 U$53 U$60-U$63 U$66-U$76 U$97-U$105 U$114-U$124 U$145-U$153 U$162-U$172 U$193-U$201 U$210-U$220 U$241-U$249 U$258-U$268 = Labels
U$2 U$32 U$94 U$95 U$142 U$143 U$190 U$191 U$238 U$239 U$286 U$287 = interrupt
U$11 U$80 U$128 U$176 U$224 U$272 = board lables
U$12 U$17 U$82 U$83 U$130 U$131 U$178 U$179 U$226 U$227 U$274 U$275 = LEDs
U$13 U$16 U$21 U$27 U$28 U$30 U$85-U$87 U$91-U$93 U$133-U$135 U$139-U$141 U$181-U$183 U$187-U$189 U$229-U$231 U$235-U$237 U$277-U$279 U$283-U$285 = Orientation
U$15 U$90 U$138 U$186 U$234 U$282 = Neo-m8u
U$22 U$54 U$106 U$154 U$202 U$250 = buzzard_labels (5)
U$25 U$84 U$132 U$180 U$228 U$276 = ANT
U$26 U$29 U$31 U$37 U$78 U$79 U$88 U$89 U$126 U$127 U$136 U$137 U$174 U$175 U$184 U$185 U$222 U$223 U$232 U$233 U$270 U$271 U$280 U$281 = buzzard_labels (36)
U$34 U$96 U$144 U$192 U$240 U$288 = buzzard_labels
U$35 U$36 U$39 U$40 U$43 U$44 U$55-U$59 U$64 U$107-U$112 U$155-U$160 U$203-U$208 U$251-U$256 = buzzard_labels (7)
U$52 U$65 U$113 U$161 U$209 U$257 = buzzard_labels (33)

## Nets
3.3V [3.3V]: C4.1 C5.2 D3.A J1.2 J3.2 J4.2 J6.3 JP1.2 JP2.2 R3.2 U1.7 U1.23 U2.5
3.3V1 [3.3V]: C7.1 C8.2 D6.A J8.2 J9.2 J11.3 J12.2 JP17.2 JP24.2 R28.2 U3.5 U4.7 U4.23
3.3V2 [3.3V]: C12.1 C13.2 D10.A J15.2 J16.2 J18.3 J19.2 JP29.2 JP36.2 R43.2 U5.5 U6.7 U6.23
3.3V3 [3.3V]: C17.1 C18.2 D14.A J22.2 J23.2 J25.3 J26.2 JP41.2 JP48.2 R58.2 U7.5 U8.7 U8.23
3.3V4 [3.3V]: C22.1 C23.2 D18.A J29.2 J30.2 J32.3 J33.2 JP53.2 JP60.2 R73.2 U9.5 U10.7 U10.23
3.3V5 [3.3V]: C27.1 C28.2 D22.A J36.2 J37.2 J39.3 J40.2 JP65.2 JP72.2 R88.2 U11.5 U12.7 U12.23
5V: C2.1 D4.5 J5.VBUS1 J5.VBUS2 J6.2 U2.1 U2.3
5V1: C9.1 D8.5 J11.2 J13.VBUS1 J13.VBUS2 U3.1 U3.3
5V2: C14.1 D12.5 J18.2 J20.VBUS1 J20.VBUS2 U5.1 U5.3
5V3: C19.1 D16.5 J25.2 J27.VBUS1 J27.VBUS2 U7.1 U7.3
5V4: C24.1 D20.5 J32.2 J34.VBUS1 J34.VBUS2 U9.1 U9.3
5V5: C29.1 D24.5 J39.2 J41.VBUS1 J41.VBUS2 U11.1 U11.3
!RESET: J2.2 U1.8
!RESET1: J14.2 U4.8
!RESET2: J21.2 U6.8
!RESET3: J28.2 U8.8
!RESET4: J35.2 U10.8
!RESET5: J42.2 U12.8
ANT_VCC: C3.1 FB1.2 R15.1
ANT_VCC1: C10.1 FB2.2 R27.1
ANT_VCC2: C15.1 FB3.2 R42.1
ANT_VCC3: C20.1 FB4.2 R57.1
ANT_VCC4: C25.1 FB5.2 R72.1
ANT_VCC5: C30.1 FB6.2 R87.1
D+: D4.4 R1.1
D+1: D8.4 R25.1
D+2: D12.4 R40.1
D+3: D16.4 R55.1
D+4: D20.4 R70.1
D+5: D24.4 R85.1
D-: D4.6 R2.1
D-1: D8.6 R26.1
D-2: D12.6 R41.1
D-3: D16.6 R56.1
D-4: D20.6 R71.1
D-5: D24.6 R86.1
D_SEL: JP4.2 U1.2
D_SEL1: JP23.2 U4.2
D_SEL2: JP35.2 U6.2
D_SEL3: JP47.2 U8.2
D_SEL4: JP59.2 U10.2
D_SEL5: JP71.2 U12.2
EXT_INT: J2.4 U1.4
EXT_INT1: J14.4 U4.4
EXT_INT2: J21.4 U6.4
EXT_INT3: J28.4 U8.4
EXT_INT4: J35.4 U10.4
EXT_INT5: J42.4 U12.4
GND: BT1.- C1.2 C2.2 C3.2 C4.2 C5.1 D1.C D2.C D4.2 J1.1 J3.1 J4.1 J5.GND J5.GND2 J6.1 J7.1 J7.2 JP4.1 R3.1 R12.1 R13.1 U1.10 U1.12 U1.13 U1.24 U2.2
GND1: BT2.- C6.2 C7.2 C8.1 C9.2 C10.2 D5.C D7.C D8.2 J8.1 J9.1 J10.1 J10.2 J11.1 J12.1 J13.GND J13.GND2 JP23.1 R28.1 R29.1 R30.1 U3.2 U4.10 U4.12 U4.13 U4.24
GND2: BT3.- C11.2 C12.2 C13.1 C14.2 C15.2 D9.C D11.C D12.2 J15.1 J16.1 J17.1 J17.2 J18.1 J19.1 J20.GND J20.GND2 JP35.1 R43.1 R44.1 R45.1 U5.2 U6.10 U6.12 U6.13 U6.24
GND3: BT4.- C16.2 C17.2 C18.1 C19.2 C20.2 D13.C D15.C D16.2 J22.1 J23.1 J24.1 J24.2 J25.1 J26.1 J27.GND J27.GND2 JP47.1 R58.1 R59.1 R60.1 U7.2 U8.10 U8.12 U8.13 U8.24
GND4: BT5.- C21.2 C22.2 C23.1 C24.2 C25.2 D17.C D19.C D20.2 J29.1 J30.1 J31.1 J31.2 J32.1 J33.1 J34.GND J34.GND2 JP59.1 R73.1 R74.1 R75.1 U9.2 U10.10 U10.12 U10.13 U10.24
GND5: BT6.- C26.2 C27.2 C28.1 C29.2 C30.2 D21.C D23.C D24.2 J36.1 J37.1 J38.1 J38.2 J39.1 J40.1 J41.GND J41.GND2 JP71.1 R88.1 R89.1 R90.1 U11.2 U12.10 U12.12 U12.13 U12.24
GPS_ANT1: FB1.1 J7.FEED U1.11
GPS_ANT2: FB2.1 J10.FEED U4.11
GPS_ANT3: FB3.1 J17.FEED U6.11
GPS_ANT4: FB4.1 J24.FEED U8.11
GPS_ANT5: FB5.1 J31.FEED U10.11
GPS_ANT6: FB6.1 J38.FEED U12.11
N$1: JP2.1 R5.2
N$2: D2.A R6.1
N$3: R8.1 U1.18
N$4: JP3.1 R6.2
N$5: JP1.1 R7.2
N$6: D3.C R14.2
N$7: J5.B5 R12.2
N$8: JP1.3 R4.2
N$9: J5.A5 R13.2
N$10: D1.A R5.1
N$11: R1.2 U1.6
N$12: R2.2 U1.5
N$13: R9.1 U1.19
N$14: JP17.1 R19.2
N$15: R10.1 U1.20
N$16: R11.1 U1.21
N$17: JP17.3 R18.2
N$18: D5.A R21.1
N$19: JP18.1 R21.2
N$20: D6.C R20.2
N$21: D7.A R24.1
N$22: R25.2 U4.6
N$23: R26.2 U4.5
N$24: JP24.1 R24.2
N$25: J13.B5 R29.2
N$26: J13.A5 R30.2
N$27: R22.1 U4.18
N$28: R23.1 U4.19
N$29: R16.1 U4.20
N$30: R17.1 U4.21
N$31: JP29.1 R34.2
N$32: JP29.3 R33.2
N$33: D9.A R36.1
N$34: JP30.1 R36.2
N$35: D10.C R35.2
N$36: D11.A R39.1
N$37: R40.2 U6.6
N$38: R41.2 U6.5
N$39: JP36.1 R39.2
N$40: J20.B5 R44.2
N$41: J20.A5 R45.2
N$42: R37.1 U6.18
N$43: R38.1 U6.19
N$44: R31.1 U6.20
N$45: R32.1 U6.21
N$46: JP41.1 R49.2
N$47: JP41.3 R48.2
N$48: D13.A R51.1
N$49: JP42.1 R51.2
N$50: D14.C R50.2
N$51: D15.A R54.1
N$52: R55.2 U8.6
N$53: R56.2 U8.5
N$54: JP48.1 R54.2
N$55: J27.B5 R59.2
N$56: J27.A5 R60.2
N$57: R52.1 U8.18
N$58: R53.1 U8.19
N$59: R46.1 U8.20
N$60: R47.1 U8.21
N$61: JP53.1 R64.2
N$62: JP53.3 R63.2
N$63: D17.A R66.1
N$64: JP54.1 R66.2
N$65: D18.C R65.2
N$66: D19.A R69.1
N$67: R70.2 U10.6
N$68: R71.2 U10.5
N$69: JP60.1 R69.2
N$70: J34.B5 R74.2
N$71: J34.A5 R75.2
N$72: R67.1 U10.18
N$73: R68.1 U10.19
N$74: R61.1 U10.20
N$75: R62.1 U10.21
N$76: JP65.1 R79.2
N$77: JP65.3 R78.2
N$78: D21.A R81.1
N$79: JP66.1 R81.2
N$80: D22.C R80.2
N$81: D23.A R84.1
N$82: R85.2 U12.6
N$83: R86.2 U12.5
N$84: JP72.1 R84.2
N$85: J41.B5 R89.2
N$86: J41.A5 R90.2
N$87: R82.1 U12.18
N$88: R83.1 U12.19
N$89: R76.1 U12.20
N$90: R77.1 U12.21
PPS: J2.1 JP3.2 U1.3
PPS1: J14.1 JP18.2 U4.3
PPS2: J21.1 JP30.2 U6.3
PPS3: J28.1 JP42.2 U8.3
PPS4: J35.1 JP54.2 U10.3
PPS5: J42.1 JP66.2 U12.3
RXI/MOSI: J6.5 R11.2
RXI/MOSI1: J11.5 R17.2
RXI/MOSI2: J18.5 R32.2
RXI/MOSI3: J25.5 R47.2
RXI/MOSI4: J32.5 R62.2
RXI/MOSI5: J39.5 R77.2
SCL/SCK: J1.4 J3.4 J4.4 J6.7 R4.1 R9.2
SCL/SCK1: J8.4 J9.4 J11.7 J12.4 R18.1 R23.2
SCL/SCK2: J15.4 J16.4 J18.7 J19.4 R33.1 R38.2
SCL/SCK3: J22.4 J23.4 J25.7 J26.4 R48.1 R53.2
SCL/SCK4: J29.4 J30.4 J32.7 J33.4 R63.1 R68.2
SCL/SCK5: J36.4 J37.4 J39.7 J40.4 R78.1 R83.2
SDA/!CS: J1.3 J3.3 J4.3 J6.4 R7.1 R8.2
SDA/!CS1: J8.3 J9.3 J11.4 J12.3 R19.1 R22.2
SDA/!CS2: J15.3 J16.3 J18.4 J19.3 R34.1 R37.2
SDA/!CS3: J22.3 J23.3 J25.4 J26.3 R49.1 R52.2
SDA/!CS4: J29.3 J30.3 J32.4 J33.3 R64.1 R67.2
SDA/!CS5: J36.3 J37.3 J39.4 J40.3 R79.1 R82.2
SHIELD: J5.SHLD1 J5.SHLD2 J5.SHLD3 J5.SHLD4
SHIELD1: J13.SHLD1 J13.SHLD2 J13.SHLD3 J13.SHLD4
SHIELD2: J20.SHLD1 J20.SHLD2 J20.SHLD3 J20.SHLD4
SHIELD3: J27.SHLD1 J27.SHLD2 J27.SHLD3 J27.SHLD4
SHIELD4: J34.SHLD1 J34.SHLD2 J34.SHLD3 J34.SHLD4
SHIELD5: J41.SHLD1 J41.SHLD2 J41.SHLD3 J41.SHLD4
TP2/!SAFE: J2.3 U1.1
TP2/!SAFE1: J14.3 U4.1
TP2/!SAFE2: J21.3 U6.1
TP2/!SAFE3: J28.3 U8.1
TP2/!SAFE4: J35.3 U10.1
TP2/!SAFE5: J42.3 U12.1
TXO/MISO: J6.6 R10.2
TXO/MISO1: J11.6 R16.2
TXO/MISO2: J18.6 R31.2
TXO/MISO3: J25.6 R46.2
TXO/MISO4: J32.6 R61.2
TXO/MISO5: J39.6 R76.2
USB_D+: D4.3 J5.A6 J5.B6
USB_D+1: D8.3 J13.A6 J13.B6
USB_D+2: D12.3 J20.A6 J20.B6
USB_D+3: D16.3 J27.A6 J27.B6
USB_D+4: D20.3 J34.A6 J34.B6
USB_D+5: D24.3 J41.A6 J41.B6
USB_D-: D4.1 J5.A7 J5.B7
USB_D-1: D8.1 J13.A7 J13.B7
USB_D-2: D12.1 J20.A7 J20.B7
USB_D-3: D16.1 J27.A7 J27.B7
USB_D-4: D20.1 J34.A7 J34.B7
USB_D-5: D24.1 J41.A7 J41.B7
V_BATT: BT1.+ C1.1 R14.1 U1.22
V_BATT1: BT2.+ C6.1 R20.1 U4.22
V_BATT2: BT3.+ C11.1 R35.1 U6.22
V_BATT3: BT4.+ C16.1 R50.1 U8.22
V_BATT4: BT5.+ C21.1 R65.1 U10.22
V_BATT5: BT6.+ C26.1 R80.1 U12.22
VDD: R15.2 U1.9
VDD1: R27.2 U4.9
VDD2: R42.2 U6.9
VDD3: R57.2 U8.9
VDD4: R72.2 U10.9
VDD5: R87.2 U12.9

## Tracks (layer width: path | path; a pad name or v marks a point on that pad's centre or on a via)
3.3V  (via drill 0.3, 0.51)
  Top 0.508: v13.21,26.13 J3.2 | U2.5 36.65,24.27 35.33,24.27 C4.1 35.2,24.37 34.2,25.38 U1.7 | v36.58,25.12 36.67,25.02 U2.5 | J4.2 v43.69,25.12 | v37.46,21.29 37.46,23.85 37.02,24.3 U2.5 | 31.88,14.2 31.86,14.21 33.12,15.47 v36.78,15.47 | 31.88,14.2 33.53,12.55 J1.2 | 31.88,14.2 20.83,14.2 19.56,15.47 v19.56,16.4 19.56,17.27 | 19.56,18.77 19.56,19.28 20.16,19.88 U1.23 | 19.56,18.77 19.56,17.27 | D3.A 19.56,18.77 | v24,36.55 23.82,36.73 R3.2 | C5.2 17.89,17.27 19.56,17.27
  Bottom 0.381: JP2.2 37.49,21.31
  Bottom 0.508: v36.58,25.12 v43.69,25.12 | J6.3 30.99,37.47 30.07,36.55 v24,36.55 23.09,36.55 22.23,35.69 18.54,35.69 12.83,29.97 11.94,29.97 | v36.78,15.47 36.83,15.52 36.83,17.63 37.46,18.26 v37.46,21.29 37.49,21.31 | JP1.2 11.94,29.97 | 11.94,29.97 11.94,27.4 v13.21,26.13 13.21,24.64 13.21,18.01 14.82,16.4 v19.56,16.4
3.3V1  (via drill 0.3, 0.51)
  Top 0.508: v54.36,26.13 J8.2 | U3.5 77.79,24.27 76.48,24.27 C7.1 76.35,24.37 75.34,25.38 U4.7 | v77.72,25.12 77.82,25.02 U3.5 | J9.2 v84.84,25.12 | v78.61,21.29 78.61,23.85 78.17,24.3 U3.5 | 73.03,14.2 73.01,14.21 74.27,15.47 v77.93,15.47 | 73.03,14.2 74.68,12.55 J12.2 | 73.03,14.2 61.98,14.2 60.71,15.47 v60.71,16.4 60.71,17.27 | 60.71,18.77 60.71,19.28 61.31,19.88 U4.23 | 60.71,18.77 60.71,17.27 | D6.A 60.71,18.77 | v65.15,36.55 64.97,36.73 R28.2 | C8.2 59.04,17.27 60.71,17.27
  Bottom 0.381: JP24.2 78.64,21.31
  Bottom 0.508: v77.72,25.12 v84.84,25.12 | J11.3 72.14,37.47 71.22,36.55 v65.15,36.55 64.24,36.55 63.37,35.69 59.69,35.69 53.98,29.97 53.09,29.97 | v77.93,15.47 77.98,15.52 77.98,17.63 78.61,18.26 v78.61,21.29 78.64,21.31 | JP17.2 53.09,29.97 | 53.09,29.97 53.09,27.4 v54.36,26.13 54.36,24.64 54.36,18.01 55.97,16.4 v60.71,16.4
3.3V2  (via drill 0.3, 0.51)
  Top 0.508: v13.21,62.17 J15.2 | U5.5 36.65,60.31 35.33,60.31 C12.1 35.2,60.42 34.2,61.42 U6.7 | v36.58,61.16 36.67,61.07 U5.5 | J16.2 v43.69,61.16 | v37.46,57.33 37.46,59.89 37.02,60.34 U5.5 | 31.88,50.24 31.86,50.25 33.12,51.51 v36.78,51.51 | 31.88,50.24 33.53,48.59 J19.2 | 31.88,50.24 20.83,50.24 19.56,51.51 v19.56,52.44 19.56,53.31 | 19.56,54.81 19.56,55.32 20.16,55.92 U6.23 | 19.56,54.81 19.56,53.31 | D10.A 19.56,54.81 | v24,72.59 23.82,72.77 R43.2 | C13.2 17.89,53.31 19.56,53.31
  Bottom 0.381: JP36.2 37.49,57.35
  Bottom 0.508: v36.58,61.16 v43.69,61.16 | J18.3 30.99,73.51 30.07,72.59 v24,72.59 23.09,72.59 22.23,71.73 18.54,71.73 12.83,66.02 11.94,66.02 | v36.78,51.51 36.83,51.56 36.83,53.67 37.46,54.3 v37.46,57.33 37.49,57.35 | JP29.2 11.94,66.02 | 11.94,66.02 11.94,63.44 v13.21,62.17 13.21,60.68 13.21,54.05 14.82,52.44 v19.56,52.44
3.3V3  (via drill 0.3, 0.51)
  Top 0.508: v54.36,62.17 J22.2 | U7.5 77.79,60.31 76.48,60.31 C17.1 76.35,60.42 75.34,61.42 U8.7 | v77.72,61.16 77.82,61.07 U7.5 | J23.2 v84.84,61.16 | v78.61,57.33 78.61,59.89 78.17,60.34 U7.5 | 73.03,50.24 73.01,50.25 74.27,51.51 v77.93,51.51 | 73.03,50.24 74.68,48.59 J26.2 | 73.03,50.24 61.98,50.24 60.71,51.51 v60.71,52.44 60.71,53.31 | 60.71,54.81 60.71,55.32 61.31,55.92 U8.23 | 60.71,54.81 60.71,53.31 | D14.A 60.71,54.81 | v65.15,72.59 64.97,72.77 R58.2 | C18.2 59.04,53.31 60.71,53.31
  Bottom 0.381: JP48.2 78.64,57.35
  Bottom 0.508: v77.72,61.16 v84.84,61.16 | J25.3 72.14,73.51 71.22,72.59 v65.15,72.59 64.24,72.59 63.37,71.73 59.69,71.73 53.98,66.02 53.09,66.02 | v77.93,51.51 77.98,51.56 77.98,53.67 78.61,54.3 v78.61,57.33 78.64,57.35 | JP41.2 53.09,66.02 | 53.09,66.02 53.09,63.44 v54.36,62.17 54.36,60.68 54.36,54.05 55.97,52.44 v60.71,52.44
3.3V4  (via drill 0.3, 0.51)
  Top 0.508: v13.21,98.21 J29.2 | U9.5 36.65,96.36 35.33,96.36 C22.1 35.2,96.46 34.2,97.47 U10.7 | v36.58,97.21 36.67,97.11 U9.5 | J30.2 42.43,97.21 v43.69,97.21 | v37.46,93.37 37.46,95.94 37.02,96.38 U9.5 | 31.88,86.28 31.86,86.3 33.12,87.55 v36.78,87.55 | 31.88,86.28 33.53,84.63 J33.2 | 31.88,86.28 20.83,86.28 19.56,87.55 v19.56,88.48 19.56,89.36 | 19.56,90.86 19.56,91.36 20.16,91.97 U10.23 | 19.56,90.86 19.56,89.36 | D18.A 19.56,90.86 | v24,108.64 23.82,108.81 R73.2 | C23.2 17.89,89.36 19.56,89.36
  Bottom 0.381: JP60.2 37.49,93.4
  Bottom 0.508: v36.58,97.21 v43.69,97.21 | J32.3 30.99,109.55 30.07,108.64 v24,108.64 23.09,108.64 22.23,107.77 18.54,107.77 12.83,102.06 11.94,102.06 | v36.78,87.55 36.83,87.6 36.83,89.71 37.46,90.35 v37.46,93.37 37.49,93.4 | JP53.2 11.94,102.06 | 11.94,102.06 11.94,99.48 v13.21,98.21 13.21,96.72 13.21,90.09 14.82,88.48 v19.56,88.48
3.3V5  (via drill 0.3, 0.51)
  Top 0.508: v54.36,98.21 J36.2 | U11.5 77.79,96.36 76.48,96.36 C27.1 76.35,96.46 75.34,97.47 U12.7 | v77.72,97.21 77.82,97.11 U11.5 | J37.2 83.57,97.21 v84.84,97.21 | v78.61,93.37 78.61,95.94 78.17,96.38 U11.5 | 73.03,86.28 73.01,86.3 74.27,87.55 v77.93,87.55 | 73.03,86.28 74.68,84.63 J40.2 | 73.03,86.28 61.98,86.28 60.71,87.55 v60.71,88.48 60.71,89.36 | 60.71,90.86 60.71,91.36 61.31,91.97 U12.23 | 60.71,90.86 60.71,89.36 | D22.A 60.71,90.86 | v65.15,108.64 64.97,108.81 R88.2 | C28.2 59.04,89.36 60.71,89.36
  Bottom 0.381: JP72.2 78.64,93.4
  Bottom 0.508: v77.72,97.21 v84.84,97.21 | J39.3 72.14,109.55 71.22,108.64 v65.15,108.64 64.24,108.64 63.37,107.77 59.69,107.77 53.98,102.06 53.09,102.06 | v77.93,87.55 77.98,87.6 77.98,89.71 78.61,90.35 v78.61,93.37 78.64,93.4 | JP65.2 53.09,102.06 | 53.09,102.06 53.09,99.48 v54.36,98.21 54.36,96.72 54.36,90.09 55.97,88.48 v60.71,88.48
5V
  Top 0.152: D4.5 17.12,33.07 17.3,32.89 17.3,31.65 17.53,31.42 18.95,31.42 19.15,31.62 19.15,34.39 20.07,35.31
  Top 0.254: C2.1 40.59,26.1 40.49,26.2
  Top 0.305: 28.47,35.05 41.5,35.05 42.8,33.76 42.8,29.04 41.31,27.55 41.31,26.99 40.77,26.44 C2.1 | 40.49,26.2 U2.3 38.16,26.2 37.85,25.88 37.85,24.49 38.03,24.3 U2.1 | J5.VBUS2 14.92,37.12 16.43,38.63 18.24,38.63 19.82,37.05 J5.VBUS1 19.82,35.55 20.07,35.31 20.32,35.05 28.47,35.05 | J6.2 28.47,41.1 28.47,35.05
5V1
  Top 0.152: D8.5 58.27,33.07 58.45,32.89 58.45,31.65 58.67,31.42 60.1,31.42 60.3,31.62 60.3,34.39 61.21,35.31
  Top 0.254: C9.1 81.74,26.1 81.64,26.2
  Top 0.305: 69.62,35.05 82.65,35.05 83.95,33.76 83.95,29.04 82.46,27.55 82.46,26.99 81.92,26.44 C9.1 | 81.64,26.2 U3.3 79.31,26.2 78.99,25.88 78.99,24.49 79.18,24.3 U3.1 | J13.VBUS2 56.07,37.12 57.58,38.63 59.38,38.63 60.97,37.05 J13.VBUS1 60.97,35.55 61.21,35.31 61.47,35.05 69.62,35.05 | J11.2 69.62,41.1 69.62,35.05
5V2
  Top 0.152: D12.5 17.12,69.11 17.3,68.94 17.3,67.69 17.53,67.46 18.95,67.46 19.15,67.67 19.15,70.43 20.07,71.35
  Top 0.254: C14.1 40.59,62.14 40.49,62.24
  Top 0.305: 28.47,71.09 41.5,71.09 42.8,69.8 42.8,65.08 41.31,63.6 41.31,63.03 40.77,62.48 C14.1 | 40.49,62.24 U5.3 38.16,62.24 37.85,61.92 37.85,60.53 38.03,60.34 U5.1 | J20.VBUS2 14.92,73.17 16.43,74.68 18.24,74.68 19.82,73.09 J20.VBUS1 19.82,71.59 20.07,71.35 20.32,71.09 28.47,71.09 | J18.2 28.47,77.14 28.47,71.09
5V3
  Top 0.152: D16.5 58.27,69.11 58.45,68.94 58.45,67.69 58.67,67.46 60.1,67.46 60.3,67.67 60.3,70.43 61.21,71.35
  Top 0.254: C19.1 81.74,62.14 81.64,62.24
  Top 0.305: 69.62,71.09 82.65,71.09 83.95,69.8 83.95,65.08 82.46,63.6 82.46,63.03 81.92,62.48 C19.1 | 81.64,62.24 U7.3 79.31,62.24 78.99,61.92 78.99,60.53 79.18,60.34 U7.1 | J27.VBUS2 56.07,73.17 57.58,74.68 59.38,74.68 60.97,73.09 J27.VBUS1 60.97,71.59 61.21,71.35 61.47,71.09 69.62,71.09 | J25.2 69.62,77.14 69.62,71.09
5V4
  Top 0.152: D20.5 17.12,105.16 17.3,104.98 17.3,103.73 17.53,103.5 18.95,103.5 19.15,103.71 19.15,106.48 20.07,107.39
  Top 0.254: C24.1 40.59,98.18 40.49,98.28
  Top 0.305: 28.47,107.14 41.5,107.14 42.8,105.84 42.8,101.13 41.31,99.64 41.31,99.07 40.77,98.53 C24.1 | 40.49,98.28 U9.3 38.16,98.28 37.85,97.97 37.85,96.57 38.03,96.38 U9.1 | J34.VBUS2 14.92,109.21 16.43,110.72 18.24,110.72 19.82,109.13 J34.VBUS1 19.82,107.63 20.07,107.39 20.32,107.14 28.47,107.14 | J32.2 28.47,113.18 28.47,107.14
5V5
  Top 0.152: D24.5 58.27,105.16 58.45,104.98 58.45,103.73 58.67,103.5 60.1,103.5 60.3,103.71 60.3,106.48 61.21,107.39
  Top 0.254: C29.1 81.74,98.18 81.64,98.28
  Top 0.305: 69.62,107.14 82.65,107.14 83.95,105.84 83.95,101.13 82.46,99.64 82.46,99.07 81.92,98.53 C29.1 | 81.64,98.28 U11.3 79.31,98.28 78.99,97.97 78.99,96.57 79.18,96.38 U11.1 | J41.VBUS2 56.07,109.21 57.58,110.72 59.38,110.72 60.97,109.13 J41.VBUS1 60.97,107.63 61.21,107.39 61.47,107.14 69.62,107.14 | J39.2 69.62,113.18 69.62,107.14
!RESET  (via drill 0.3)
  Top 0.152: v34.16,27.43 33.49,27.43 33.18,27.75 U1.8
  Bottom 0.152: J2.2 23.37,11.81 25.02,13.46 34.04,13.46 35.05,14.48 35.05,20.95 34.54,21.46 34.54,27.05 v34.16,27.43
!RESET1  (via drill 0.3)
  Top 0.152: v75.31,27.43 74.64,27.43 74.33,27.75 U4.8
  Bottom 0.152: J14.2 64.52,11.81 66.17,13.46 75.18,13.46 76.2,14.48 76.2,20.95 75.69,21.46 75.69,27.05 v75.31,27.43
!RESET2  (via drill 0.3)
  Top 0.152: v34.16,63.47 33.49,63.47 33.18,63.79 U6.8
  Bottom 0.152: J21.2 23.37,47.85 25.02,49.5 34.04,49.5 35.05,50.52 35.05,57 34.54,57.51 34.54,63.09 v34.16,63.47
!RESET3  (via drill 0.3)
  Top 0.152: v75.31,63.47 74.64,63.47 74.33,63.79 U8.8
  Bottom 0.152: J28.2 64.52,47.85 66.17,49.5 75.18,49.5 76.2,50.52 76.2,57 75.69,57.51 75.69,63.09 v75.31,63.47
!RESET4  (via drill 0.3)
  Top 0.152: v34.16,99.52 33.49,99.52 33.18,99.83 U10.8
  Bottom 0.152: J35.2 23.37,83.9 25.02,85.55 34.04,85.55 35.05,86.56 35.05,93.04 34.54,93.55 34.54,99.14 v34.16,99.52
!RESET5  (via drill 0.3)
  Top 0.152: v75.31,99.52 74.64,99.52 74.33,99.83 U12.8
  Bottom 0.152: J42.2 64.52,83.9 66.17,85.55 75.18,85.55 76.2,86.56 76.2,93.04 75.69,93.55 75.69,99.14 v75.31,99.52
ANT_VCC
  Top 0.305: R15.1 37.21,27.91
  Top 0.508: C3.1 37.21,27.91 37.21,28.55 36.03,29.73 FB1.2
ANT_VCC1
  Top 0.305: R27.1 78.36,27.91
  Top 0.508: C10.1 78.36,27.91 78.36,28.55 77.18,29.73 FB2.2
ANT_VCC2
  Top 0.305: R42.1 37.21,63.96
  Top 0.508: C15.1 37.21,63.96 37.21,64.59 36.03,65.77 FB3.2
ANT_VCC3
  Top 0.305: R57.1 78.36,63.96
  Top 0.508: C20.1 78.36,63.96 78.36,64.59 77.18,65.77 FB4.2
ANT_VCC4
  Top 0.305: R72.1 37.21,100
  Top 0.508: C25.1 37.21,100 37.21,100.63 36.03,101.82 FB5.2
ANT_VCC5
  Top 0.305: R87.1 78.36,100
  Top 0.508: C30.1 78.36,100 78.36,100.63 77.18,101.82 FB6.2
D+
  Top 0.152: R1.1 16.62,32.41 D4.4
D+1
  Top 0.152: R25.1 57.77,32.41 D8.4
D+2
  Top 0.152: R40.1 16.62,68.45 D12.4
D+3
  Top 0.152: R55.1 57.77,68.45 D16.4
D+4
  Top 0.152: R70.1 16.62,104.49 D20.4
D+5
  Top 0.152: R85.1 57.77,104.49 D24.4
D-
  Top 0.152: R2.1 17.62,32.86 D4.6
D-1
  Top 0.152: R26.1 58.77,32.86 D8.6
D-2
  Top 0.152: R41.1 17.62,68.91 D12.6
D-3
  Top 0.152: R56.1 58.77,68.91 D16.6
D-4
  Top 0.152: R71.1 17.62,104.95 D20.6
D-5
  Top 0.152: R86.1 58.77,104.95 D24.6
D_SEL  (via drill 0.3)
  Top 0.152: U1.2 35.15,19.88 v35.69,20.42
  Bottom 0.152: JP4.2 35.66,20.4 v35.69,20.42
D_SEL1  (via drill 0.3)
  Top 0.152: U4.2 76.29,19.88 v76.84,20.42
  Bottom 0.152: JP23.2 76.81,20.4 v76.84,20.42
D_SEL2  (via drill 0.3)
  Top 0.152: U6.2 35.15,55.92 v35.69,56.46
  Bottom 0.152: JP35.2 35.66,56.44 v35.69,56.46
D_SEL3  (via drill 0.3)
  Top 0.152: U8.2 76.29,55.92 v76.84,56.46
  Bottom 0.152: JP47.2 76.81,56.44 v76.84,56.46
D_SEL4  (via drill 0.3)
  Top 0.152: U10.2 35.15,91.97 v35.69,92.51
  Bottom 0.152: JP59.2 35.66,92.48 v35.69,92.51
D_SEL5  (via drill 0.3)
  Top 0.152: U12.2 76.29,91.97 v76.84,92.51
  Bottom 0.152: JP71.2 76.81,92.48 v76.84,92.51
EXT_INT  (via drill 0.3)
  Top 0.152: v36.07,17.02 36.2,17.14 36.2,20.83 34.92,22.1 33.2,22.1 U1.4
  Bottom 0.152: J2.4 28.45,11.56 29.59,12.7 34.42,12.7 36.07,14.35 v36.07,17.02
EXT_INT1  (via drill 0.3)
  Top 0.152: v77.22,17.02 77.34,17.14 77.34,20.83 76.07,22.1 74.34,22.1 U4.4
  Bottom 0.152: J14.4 69.6,11.56 70.74,12.7 75.56,12.7 77.22,14.35 v77.22,17.02
EXT_INT2  (via drill 0.3)
  Top 0.152: v36.07,53.06 36.2,53.19 36.2,56.87 34.92,58.14 33.2,58.14 U6.4
  Bottom 0.152: J21.4 28.45,47.6 29.59,48.74 34.42,48.74 36.07,50.39 v36.07,53.06
EXT_INT3  (via drill 0.3)